# EAGLE board Memory V1.0 (EAGLE 9.6.2)
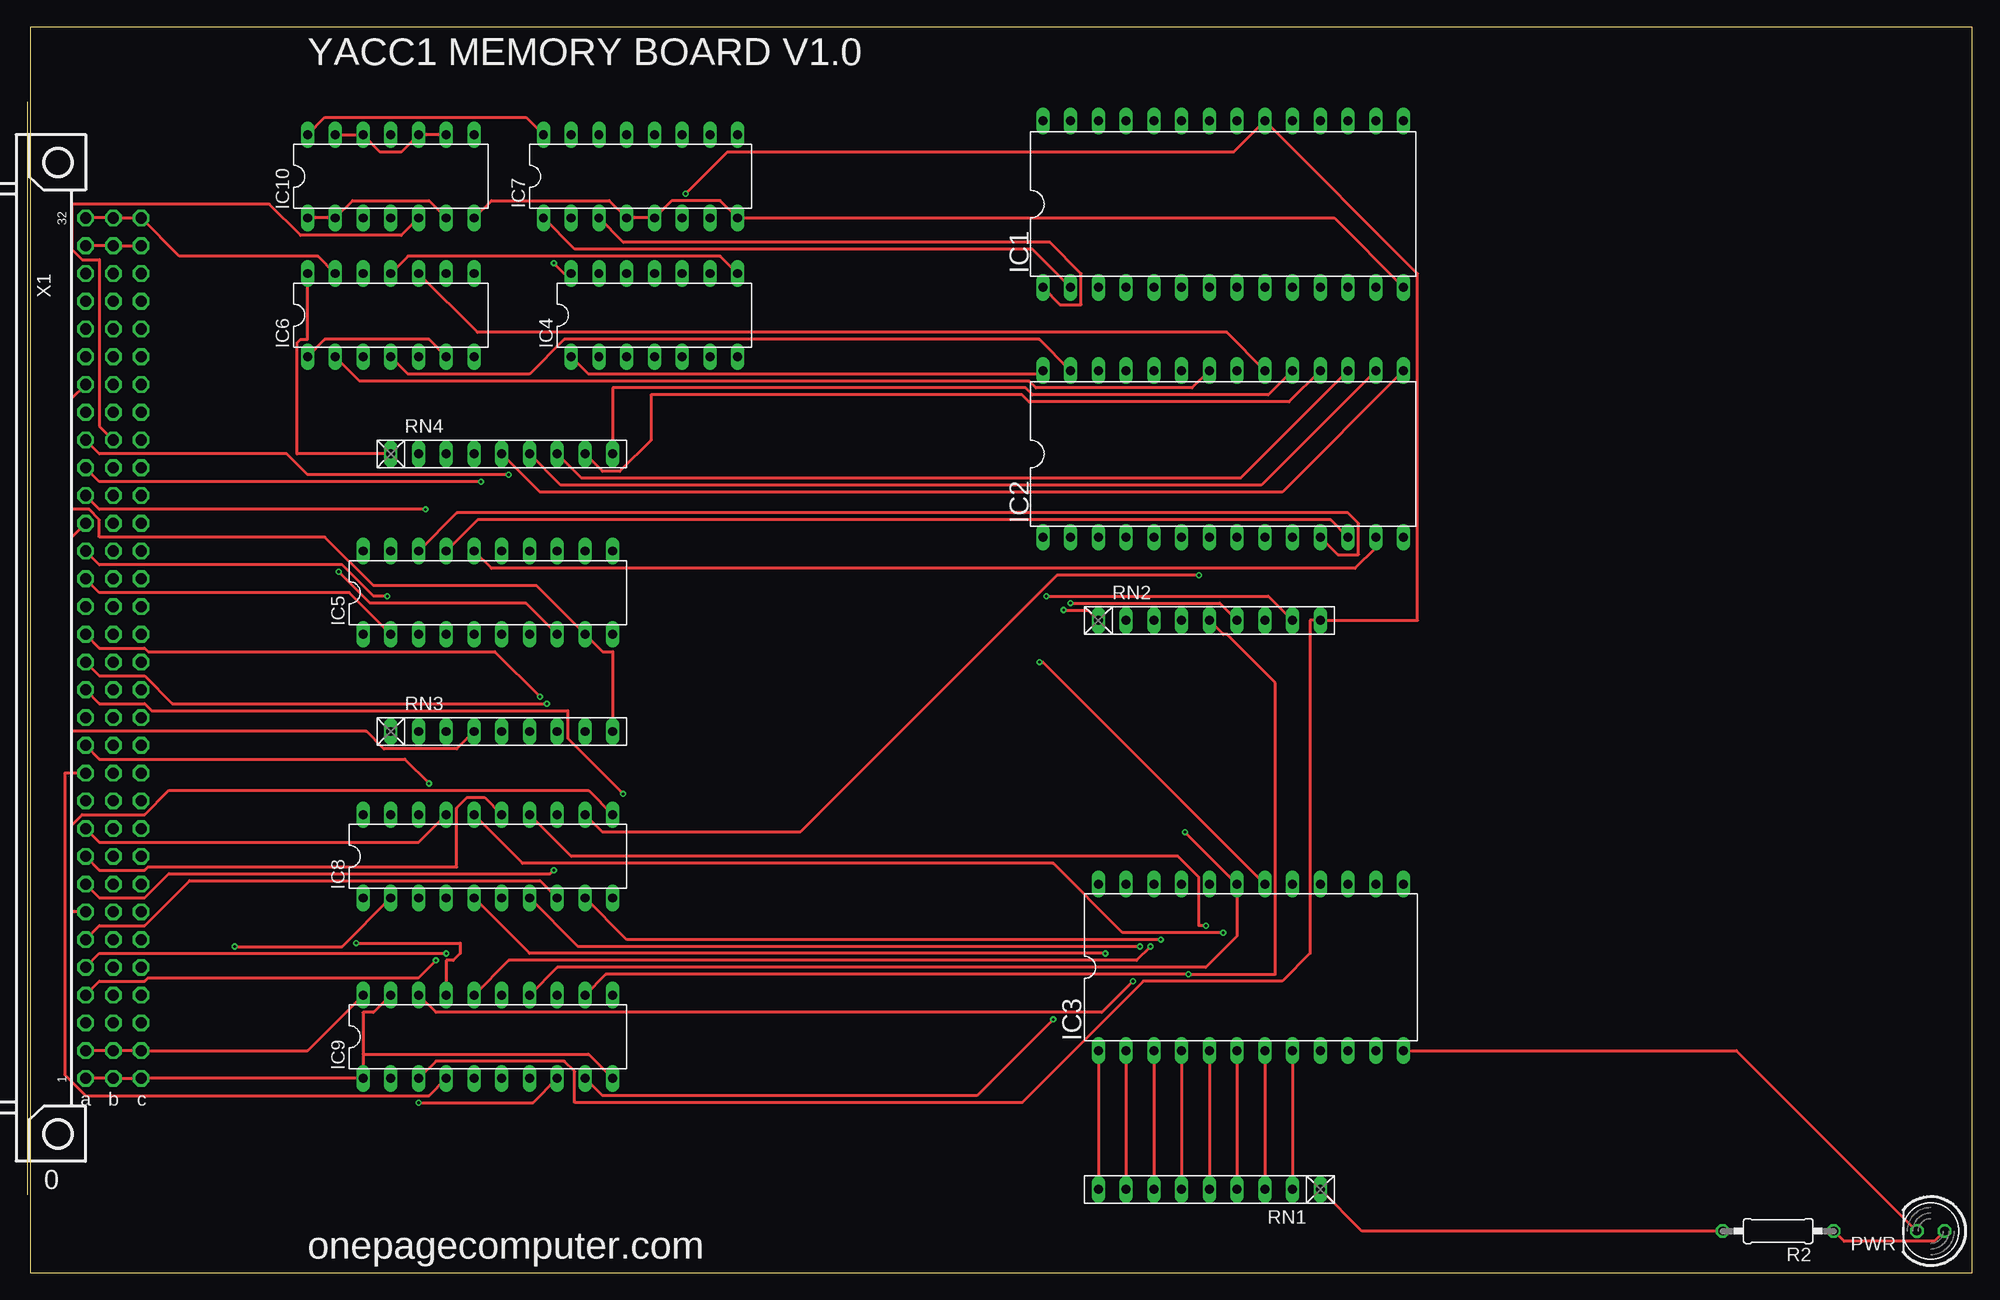
[diagram p0: board, top side]
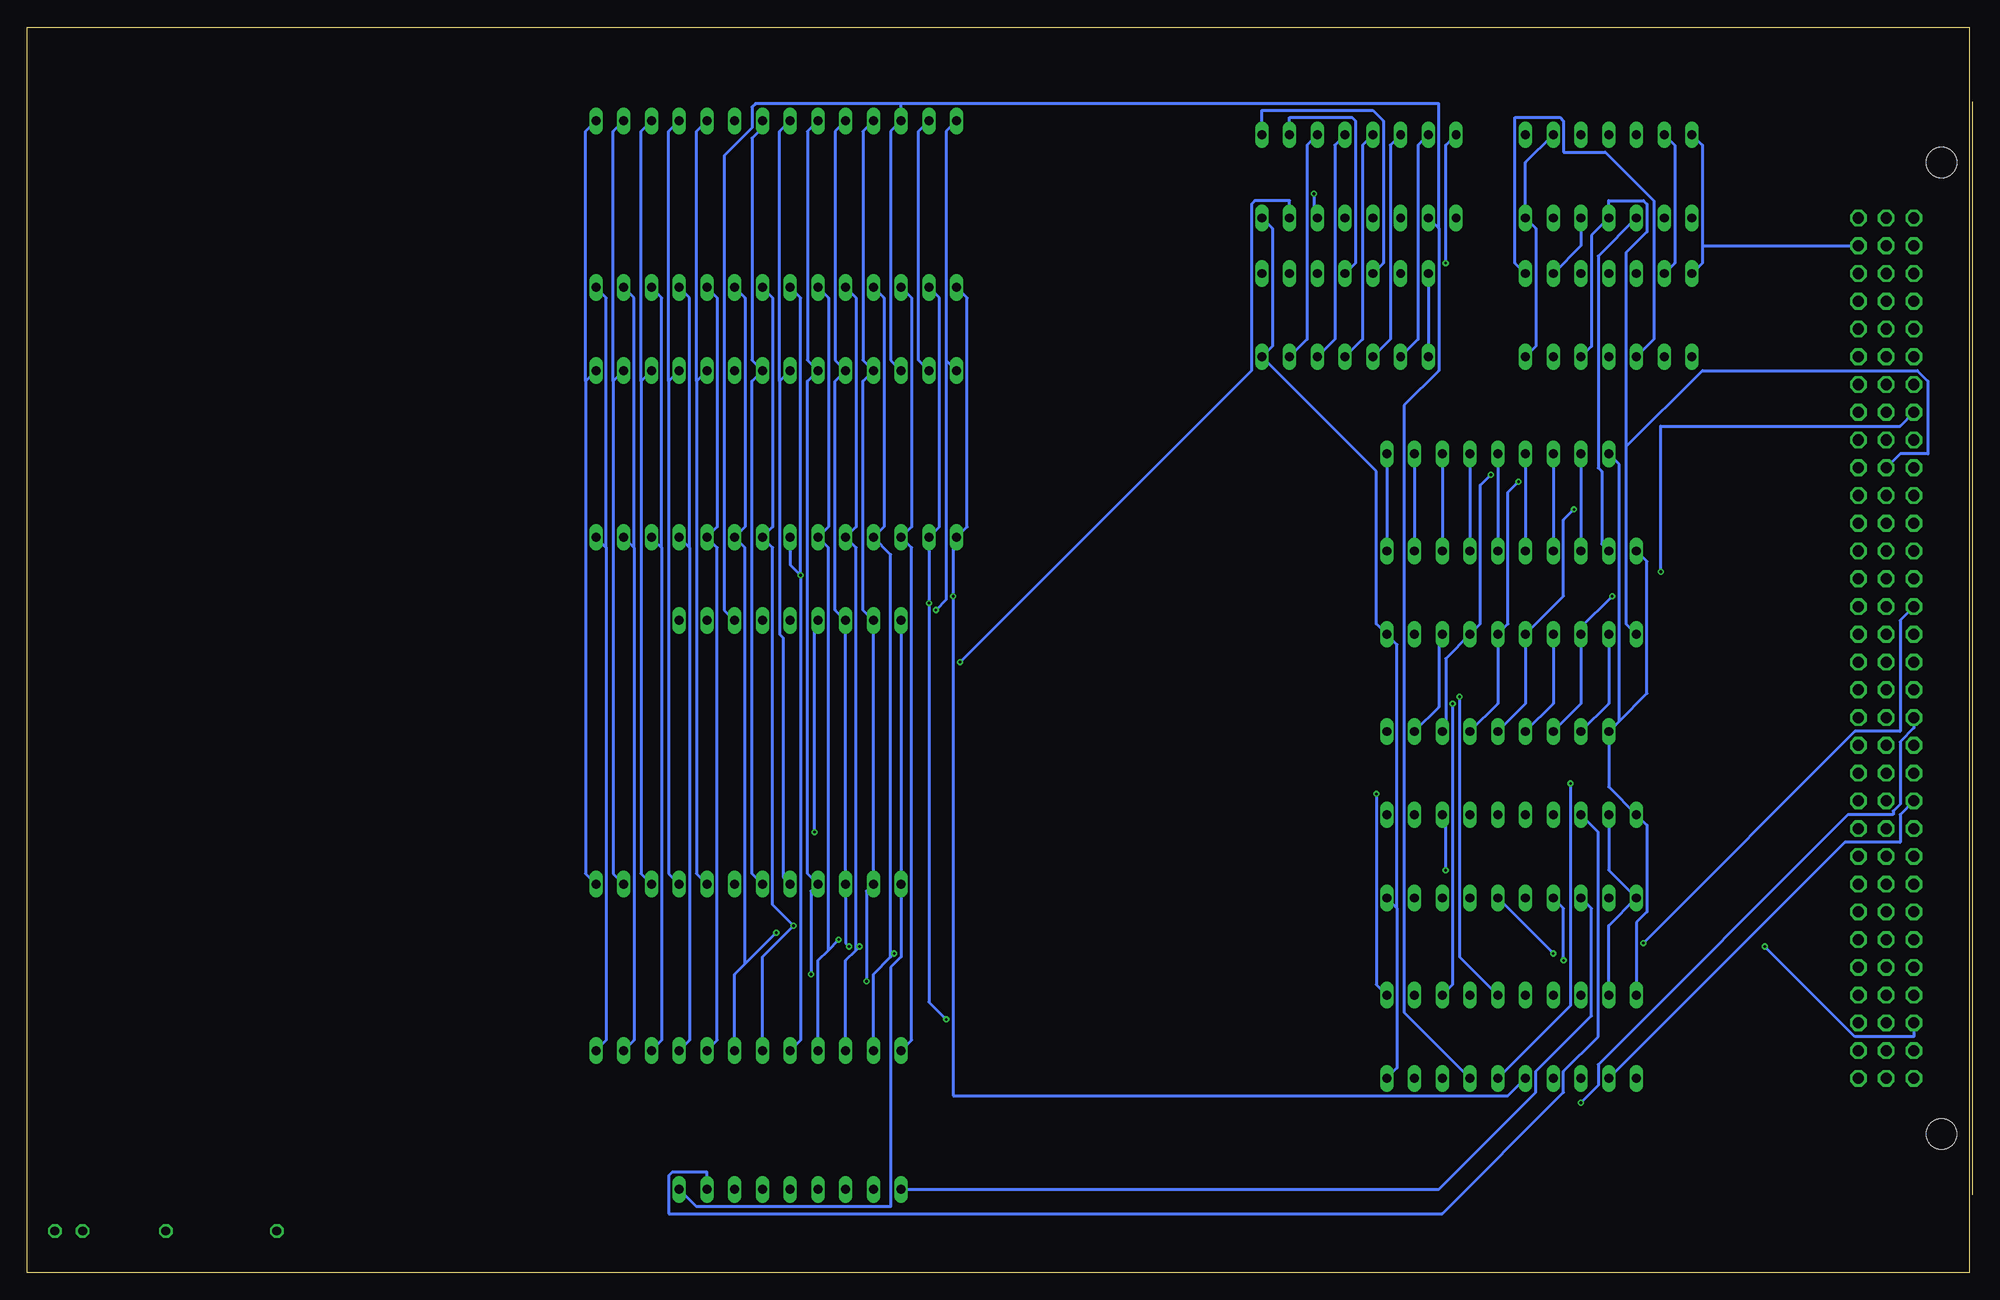
[diagram p1: board, bottom side, seen from below]

Size 177.78 x 113.97 mm. Coordinates in mm from the lower left corner, seen from the top.
Outline: 0,0 177.78,0 177.78,113.97 0,113.97 0,0
Copper layers (1*16): Top 0.035559375mm / dielectric 1.6mm / Bottom 0.035559375mm
Design rules "oshpark-2layer-auto-routing": minimum track width 10mil, minimum drill 10mil, track to track 10mil, track to pad 8mil, pad to pad 8mil, via to via 8mil, smd to smd 6mil, copper to edge 15mil, drill to drill 6mil, minimum pad ring 6mil, minimum via ring 6mil, stop-mask expansion 2.5mil, vias tented up to drill 0mil, thermal gap 10mil
Net classes: 1 GND: width 1 mm; 2 5V: width 1 mm

## Footprints (pad centres in the part's own frame; a part is rotated, then mirrored left to right if it is on the bottom)
DIL28-6 = drill 0.813 long: 1 -16.51,-7.62; 2 -13.97,-7.62; 3 -11.43,-7.62; 4 -8.89,-7.62; 5 -6.35,-7.62; 6 -3.81,-7.62; 7 -1.27,-7.62; 8 1.27,-7.62; 9 3.81,-7.62; 10 6.35,-7.62; 11 8.89,-7.62; 12 11.43,-7.62; 13 13.97,-7.62; 14 16.51,-7.62; 15 16.51,7.62; 16 13.97,7.62; 17 11.43,7.62; 18 8.89,7.62; 19 6.35,7.62; 20 3.81,7.62; 21 1.27,7.62; 22 -1.27,7.62; 23 -3.81,7.62; 24 -6.35,7.62; 25 -8.89,7.62; 26 -11.43,7.62; 27 -13.97,7.62; 28 -16.51,7.62
DIL24 = drill 0.813 long: 1 -13.97,-7.62; 2 -11.43,-7.62; 3 -8.89,-7.62; 4 -6.35,-7.62; 5 -3.81,-7.62; 6 -1.27,-7.62; 7 1.27,-7.62; 8 3.81,-7.62; 9 6.35,-7.62; 10 8.89,-7.62; 11 11.43,-7.62; 12 13.97,-7.62; 13 13.97,7.62; 14 11.43,7.62; 15 8.89,7.62; 16 6.35,7.62; 17 3.81,7.62; 18 1.27,7.62; 19 -1.27,7.62; 20 -3.81,7.62; 21 -6.35,7.62; 22 -8.89,7.62; 23 -11.43,7.62; 24 -13.97,7.62
DIL14 = drill 0.813 long: 1 -7.62,-3.81; 2 -5.08,-3.81; 3 -2.54,-3.81; 4 0,-3.81; 5 2.54,-3.81; 6 5.08,-3.81; 7 7.62,-3.81; 8 7.62,3.81; 9 5.08,3.81; 10 2.54,3.81; 11 0,3.81; 12 -2.54,3.81; 13 -5.08,3.81; 14 -7.62,3.81
DIL20 = drill 0.813 long: 1 -11.43,-3.81; 2 -8.89,-3.81; 3 -6.35,-3.81; 4 -3.81,-3.81; 5 -1.27,-3.81; 6 1.27,-3.81; 7 3.81,-3.81; 8 6.35,-3.81; 9 8.89,-3.81; 10 11.43,-3.81; 11 11.43,3.81; 12 8.89,3.81; 13 6.35,3.81; 14 3.81,3.81; 15 1.27,3.81; 16 -1.27,3.81; 17 -3.81,3.81; 18 -6.35,3.81; 19 -8.89,3.81; 20 -11.43,3.81
DIL16 = drill 0.813 long: 1 -8.89,-3.81; 2 -6.35,-3.81; 3 -3.81,-3.81; 4 -1.27,-3.81; 5 1.27,-3.81; 6 3.81,-3.81; 7 6.35,-3.81; 8 8.89,-3.81; 9 8.89,3.81; 10 6.35,3.81; 11 3.81,3.81; 12 1.27,3.81; 13 -1.27,3.81; 14 -3.81,3.81; 15 -6.35,3.81; 16 -8.89,3.81
LED5MM = drill 0.813 octagon: A -1.27,0; K 1.27,0
0207/10 = drill 0.813 octagon: 1 -5.08,0; 2 5.08,0
RN-9 = drill 0.813 long: 1 -10.16,0; 2 -7.62,0; 3 -5.08,0; 4 -2.54,0; 5 0,0; 6 2.54,0; 7 5.08,0; 8 7.62,0; 9 10.16,0
FABC96R = drill 1.016 octagon: A1 -2.54,39.37; A2 -2.54,36.83; A3 -2.54,34.29; A4 -2.54,31.75; A5 -2.54,29.21; A6 -2.54,26.67; A7 -2.54,24.13; A8 -2.54,21.59; A9 -2.54,19.05; A10 -2.54,16.51; A11 -2.54,13.97; A12 -2.54,11.43; A13 -2.54,8.89; A14 -2.54,6.35; A15 -2.54,3.81; A16 -2.54,1.27; A17 -2.54,-1.27; A18 -2.54,-3.81; A19 -2.54,-6.35; A20 -2.54,-8.89; A21 -2.54,-11.43; A22 -2.54,-13.97; A23 -2.54,-16.51; A24 -2.54,-19.05; A25 -2.54,-21.59; A26 -2.54,-24.13; A27 -2.54,-26.67; A28 -2.54,-29.21; A29 -2.54,-31.75; A30 -2.54,-34.29; A31 -2.54,-36.83; A32 -2.54,-39.37; B1 -5.08,39.37; B2 -5.08,36.83; B3 -5.08,34.29; B4 -5.08,31.75; B5 -5.08,29.21; B6 -5.08,26.67; B7 -5.08,24.13; B8 -5.08,21.59; B9 -5.08,19.05; B10 -5.08,16.51; B11 -5.08,13.97; B12 -5.08,11.43; B13 -5.08,8.89; B14 -5.08,6.35; B15 -5.08,3.81; B16 -5.08,1.27; B17 -5.08,-1.27; B18 -5.08,-3.81; B19 -5.08,-6.35; B20 -5.08,-8.89; B21 -5.08,-11.43; B22 -5.08,-13.97; B23 -5.08,-16.51; B24 -5.08,-19.05; B25 -5.08,-21.59; B26 -5.08,-24.13; B27 -5.08,-26.67; B28 -5.08,-29.21; B29 -5.08,-31.75; B30 -5.08,-34.29; B31 -5.08,-36.83; B32 -5.08,-39.37; C1 -7.62,39.37; C2 -7.62,36.83; C3 -7.62,34.29; C4 -7.62,31.75; C5 -7.62,29.21; C6 -7.62,26.67; C7 -7.62,24.13; C8 -7.62,21.59; C9 -7.62,19.05; C10 -7.62,16.51; C11 -7.62,13.97; C12 -7.62,11.43; C13 -7.62,8.89; C14 -7.62,6.35; C15 -7.62,3.81; C16 -7.62,1.27; C17 -7.62,-1.27; C18 -7.62,-3.81; C19 -7.62,-6.35; C20 -7.62,-8.89; C21 -7.62,-11.43; C22 -7.62,-13.97; C23 -7.62,-16.51; C24 -7.62,-19.05; C25 -7.62,-21.59; C26 -7.62,-24.13; C27 -7.62,-26.67; C28 -7.62,-29.21; C29 -7.62,-31.75; C30 -7.62,-34.29; C31 -7.62,-36.83; C32 -7.62,-39.37 | hole 2.794: 0,-44.456; 0,44.456

## Placement (x,y rotation side)
IC1  [DIL28-6]  109.22,97.79 0 top
IC2  [DIL28-6]  109.22,74.93 0 top
IC3  [DIL24]  111.76,27.94 0 top
IC4  74ALS30N  [DIL14]  57.15,87.63 0 top
IC5  74LS245N  [DIL20]  41.91,62.23 0 top
IC6  74LS04N  [DIL14]  33.02,87.63 0 top
IC7  74LS138N  [DIL16]  55.88,100.33 0 top
IC8  74LS244N  [DIL20]  41.91,38.1 0 top
IC9  74LS244N  [DIL20]  41.91,21.59 0 top
IC10  74ALS00N  [DIL14]  33.02,100.33 0 top
PWR  [LED5MM]  173.99,3.81 180 top
R2  330  [0207/10]  160.02,3.81 180 top
RN1  [RN-9]  107.95,7.62 180 top
RN2  [RN-9]  107.95,59.69 0 top
RN3  [RN-9]  43.18,49.53 0 top
RN4  [RN-9]  43.18,74.93 0 top
X1  FABC96R  [FABC96R]  2.54,57.15 180 top

## Library data of the parts
IC1 IC2 = memory-hitachi; OC_FARNELL: unknown; OC_NEWARK: unknown
IC3 = memory
IC4 IC6-IC10 = 74xx-us
IC5 = adafruit
PWR = led
R2 = eagle-ltspice; SPICEMODEL: NONE; SPICEPREFIX: R
RN1-RN4 = resistor-net; OC_FARNELL: unknown; OC_NEWARK: unknown
X1 = con-vg

## Nets
-AC-LD: X1.C22
-AC-LD-INV: X1.C20
-AC-RD: X1.C21
-ADDR-REG-LD0: X1.C4
-ADDR-REG-LD1: X1.C6
-ADDR-REG-RD0: X1.C3
-ADDR-REG-RD1: X1.C5
-ALU-FUNC: X1.C15
-BUS-EN: X1.C28
-HI-RAM: IC2.20 IC6.10
-HL-SWAP: X1.C25
-IN: X1.C26
-INT: X1.C13
-INTA: X1.C14
-IO-ADDR-LD: X1.C11
-IO-RD: X1.B25
-IO-WR: X1.B26
-MEM-RD: IC5.1 IC6.5 IC10.4 X1.B23
-MEM-WR: IC6.9 IC10.5 X1.B24
-OUT: X1.C27
-REG-DN: X1.B21
-REG-FUNC-LD: X1.B8
-REG-FUNC-RD: X1.B7
-REG-LD-HI: X1.B20
-REG-LD-LO: X1.B18
-REG-RD-HI: X1.B19
-REG-RD-LO: X1.B17
-REG-UP: X1.B22
-RESET: X1.C30
-ROM: IC3.18 IC7.7
-RUN: X1.C29
-SR-LD: X1.C23
-TMP-REG-LD0: X1.B28
-TMP-REG-LD1: X1.B30
-TMP-REG-RD0: X1.B27
-TMP-REG-RD1: X1.B29
ADDR0: IC8.2 X1.A3
ADDR1: IC8.4 X1.A4
ADDR2: IC8.6 X1.A5
ADDR3: IC8.8 X1.A6
ADDR4: IC8.11 X1.A7
ADDR5: IC8.13 X1.A8
ADDR6: IC8.15 X1.A9
ADDR7: IC8.17 X1.A10
ADDR8: IC9.2 X1.A11
ADDR9: IC9.4 X1.A12
ADDR10: IC9.6 X1.A13
ADDR11: IC9.8 X1.A14
ADDR12: IC9.11 X1.A15
ADDR13: IC9.13 X1.A16
ADDR14: IC9.15 X1.A17
ADDR15: IC9.17 X1.A18
ALU0: X1.C16
ALU1: X1.C17
ALU2: X1.C18
ALU3: X1.C19
BADDR0: IC1.10 IC2.10 IC3.8 IC8.18 RN1.2
BADDR1: IC1.9 IC2.9 IC3.7 IC8.16 RN1.3
BADDR2: IC1.8 IC2.8 IC3.6 IC8.14 RN1.4
BADDR3: IC1.7 IC2.7 IC3.5 IC8.12 RN1.5
BADDR4: IC1.6 IC2.6 IC3.4 IC8.9 RN1.6
BADDR5: IC1.5 IC2.5 IC3.3 IC8.7 RN1.7
BADDR6: IC1.4 IC2.4 IC3.2 IC8.5 RN1.8
BADDR7: IC1.3 IC2.3 IC3.1 IC8.3 RN1.9
BADDR8: IC1.25 IC2.25 IC3.23 IC9.18 RN2.2
BADDR9: IC1.24 IC2.24 IC3.22 IC9.16 RN2.3
BADDR10: IC1.21 IC2.21 IC3.19 IC9.14 RN2.4
BADDR11: IC1.23 IC2.23 IC3.21 IC9.12 RN2.5
BADDR12: IC1.2 IC2.2 IC7.1 IC9.9 RN2.6
BADDR13: IC1.26 IC2.26 IC7.2 IC9.7 RN2.7
BADDR14: IC1.1 IC2.1 IC7.3 IC9.5 RN2.8
BADDR15: IC1.20 IC7.6 IC9.3 RN2.9
BDATA0: IC1.11 IC2.11 IC3.9 IC5.18 RN4.2
BDATA1: IC1.12 IC2.12 IC3.10 IC5.17 RN4.3
BDATA2: IC1.13 IC2.13 IC3.11 IC5.16 RN4.4
BDATA3: IC1.15 IC2.15 IC3.13 IC5.15 RN4.5
BDATA4: IC1.16 IC2.16 IC3.14 IC5.14 RN4.6
BDATA5: IC1.17 IC2.17 IC3.15 IC5.13 RN4.7
BDATA6: IC1.18 IC2.18 IC3.16 IC5.12 RN4.8
BDATA7: IC1.19 IC2.19 IC3.17 IC5.11 RN4.9
BR-COND: X1.C24
DATA0: IC5.2 RN3.2 X1.A19
DATA1: IC5.3 RN3.3 X1.A20
DATA2: IC5.4 RN3.4 X1.A21
DATA3: IC5.5 RN3.5 X1.A22
DATA4: IC5.6 RN3.6 X1.A23
DATA5: IC5.7 RN3.7 X1.A24
DATA6: IC5.8 RN3.8 X1.A25
DATA7: IC5.9 RN3.9 X1.A26
DATA8: X1.A27
DATA9: X1.A28
DATA10: X1.A29
DATA11: X1.A30
DATA12: X1.B3
DATA13: X1.B4
DATA14: X1.B5
DATA15: X1.B6
GND: IC1.14 IC2.14 IC3.12 IC4.7 IC5.10 IC6.7 IC6.13 IC7.4 IC7.5 IC7.8 IC8.1 IC8.10 IC8.19 IC9.1 IC9.10 IC9.19 IC10.7 IC10.9 IC10.10 IC10.12 IC10.13 PWR.K X1.A1 X1.A32 X1.B1 X1.B32 X1.C1 X1.C32
IO-ADDR0: X1.C7
IO-ADDR1: X1.C8
IO-ADDR2: X1.C9
IO-ADDR3: X1.C10
MEM-RD: IC6.1 IC6.6
N$1: IC4.12 IC7.9
N$2: IC6.3 IC6.8
N$3: IC1.22 IC2.22 IC3.20 IC6.2
N$4: IC1.27 IC2.27 IC6.4
N$5: IC4.11 IC7.10
N$6: IC4.6 IC7.11
N$7: IC4.5 IC7.12
N$8: IC4.4 IC7.13
N$9: IC4.3 IC7.14
N$10: IC4.2 IC7.15
N$11: PWR.A R2.1
N$12: IC10.1 IC10.2 IC10.6
N$13: IC5.19 IC10.3
N$14: IC4.8 IC6.11
REG-LD-ID0: X1.B13
REG-LD-ID1: X1.B14
REG-LD-ID2: X1.B15
REG-LD-ID3: X1.B16
REG-RD-ID0: X1.B9
REG-RD-ID1: X1.B10
REG-RD-ID2: X1.B11
REG-RD-ID3: X1.B12
UNUSED0: X1.C12
VCC: IC1.28 IC2.28 IC3.24 IC4.1 IC4.14 IC5.20 IC6.14 IC7.16 IC8.20 IC9.20 IC10.14 R2.2 RN1.1 RN2.1 RN3.1 RN4.1 X1.A2 X1.A31 X1.B2 X1.B31 X1.C2 X1.C31

## Tracks (layer width: path | path; a pad name or v marks a point on that pad's centre or on a via)
-HI-RAM
  Top 0.254: IC6.10 40.96,86.04 109.54,86.04 IC2.20
-MEM-RD
  Bottom 0.254: IC5.1 31.43,59.37 31.43,75.56 | 31.43,75.56 31.43,93.34 29.53,95.25 29.53,97.79 29.84,98.11 33.02,98.11 IC10.4 34.61,94.93 34.61,84.77 IC6.5 | X1.B23 6.35,74.93 3.81,74.93 3.81,81.6 4.76,82.55 24.45,82.55 31.43,75.56
-MEM-WR
  Top 0.254: X1.B24 6.35,77.47 6.35,92.71 4.76,92.71 3.81,93.66 3.81,97.79 21.91,97.79 24.77,94.93 33.97,94.93 IC10.5
  Bottom 0.254: IC6.9 35.56,93.98 IC10.5
-ROM  (via drill 0.25)
  Top 0.254: IC3.18 92.71,55.88 v92.39,55.88
  Bottom 0.254: v92.39,55.88 65.72,82.55 65.72,97.79 65.41,98.11 62.23,98.11 IC7.7
ADDR0  (via drill 0.25)
  Top 0.254: IC8.2 28.57,29.84 v18.73,29.84
  Bottom 0.254: v18.73,29.84 10.48,21.59 5.08,21.59 X1.A3
ADDR1  (via drill 0.25)
  Top 0.254: v37.15,28.57 35.56,26.99 10.79,26.99 10.48,26.67 6.35,26.67 X1.A4
  Bottom 0.254: IC8.4 37.15,33.34 v37.15,28.57
ADDR2  (via drill 0.25)
  Top 0.254: v38.1,29.21 6.35,29.21 X1.A5
  Bottom 0.254: v38.1,29.21 IC8.6
ADDR3
  Top 0.254: IC8.8 46.67,35.88 14.61,35.88 10.48,31.75 6.35,31.75 X1.A6
ADDR4
  Top 0.254: IC8.11 51.12,44.13 12.7,44.13 10.48,41.91 4.76,41.91 3.81,40.96 3.81,33.02 X1.A7
ADDR5  (via drill 0.25)
  Top 0.254: v47.94,36.83 47.62,36.51 12.7,36.51 10.48,34.29 6.35,34.29 X1.A8
  Bottom 0.254: IC8.13 47.94,41.59 v47.94,36.83
ADDR6
  Top 0.254: IC8.15 41.59,43.5 40.01,43.5 39.05,42.55 39.05,37.15 10.79,37.15 10.48,36.83 6.35,36.83 X1.A9
ADDR7
  Top 0.254: IC8.17 35.56,39.37 6.35,39.37 X1.A10
ADDR8
  Bottom 0.254: IC9.2 11.43,39.37 6.35,39.37 6.35,41.91 X1.A11
ADDR9
  Top 0.254: IC9.4 36.51,16.19 5.08,16.19 3.17,18.1 3.17,45.72 X1.A12
ADDR10  (via drill 0.25)
  Top 0.254: v36.51,44.77 34.29,46.99 6.35,46.99 X1.A13
  Bottom 0.254: IC9.6 36.51,24.45 v36.51,44.77
ADDR11  (via drill 0.25)
  Top 0.254: IC9.8 46.04,15.56 v35.56,15.56
  Bottom 0.254: v35.56,15.56 33.97,17.14 33.97,19.05 11.11,41.91 6.99,41.91 6.99,42.23 6.35,42.86 6.35,48.58 5.08,49.85 X1.A14
ADDR12  (via drill 0.25)
  Top 0.254: v54.29,43.81 49.21,48.9 49.21,51.44 11.11,51.44 10.48,52.07 6.35,52.07 X1.A15
  Bottom 0.254: IC9.11 54.29,26.35 v54.29,43.81
ADDR13  (via drill 0.25)
  Top 0.254: v47.31,52.07 13.02,52.07 10.48,54.61 6.35,54.61 X1.A16
  Bottom 0.254: IC9.13 47.31,26.35 v47.31,52.07
ADDR14  (via drill 0.25)
  Top 0.254: v46.67,52.7 42.55,56.83 10.79,56.83 10.48,57.15 6.35,57.15 X1.A17
  Bottom 0.254: IC9.15 46.67,28.89 v46.67,52.7
ADDR15  (via drill 0.25)
  Top 0.254: IC9.17 38.1,28.57 38.73,28.57 39.37,29.21 39.37,30.16 v29.84,30.16
  Bottom 0.254: v29.84,30.16 10.48,49.53 6.35,49.53 6.35,59.69 X1.A18
BADDR0
  Top 0.254: IC3.8 RN1.2
  Bottom 0.254: IC1.10 114.62,89.22 114.62,68.26 IC2.10 114.62,66.36 114.62,21.27 IC3.8 | IC8.18 33.97,40.32 33.97,21.59 37.15,18.41 37.15,16.51 48.26,5.4 119.06,5.4 119.06,8.89 118.75,9.21 115.57,9.21 RN1.2
BADDR1  (via drill 0.25)
  Top 0.254: IC3.7 RN1.3 | IC8.16 45.09,37.47 93.66,37.47 100.01,31.11 v109.22,31.11
  Bottom 0.254: IC1.9 112.08,89.22 112.08,68.26 IC2.9 112.08,66.36 112.08,28.26 | 112.08,28.26 113.03,27.3 IC3.7 | 112.08,28.26 v109.22,31.11
BADDR2  (via drill 0.25)
  Top 0.254: IC8.14 49.53,38.1 105.09,38.1 107,36.2 107,31.75 v107.63,31.75 | IC3.6 RN1.4
  Bottom 0.254: IC1.8 109.54,89.22 109.54,68.26 IC2.8 109.54,66.36 109.54,33.66 v107.63,31.75 110.49,28.89 IC3.6
BADDR3  (via drill 0.25)
  Top 0.254: IC3.5 RN1.5 | IC8.12 52.39,40.32 70.48,40.32 93.98,63.82 v107,63.82
  Bottom 0.254: v107,63.82 107.95,64.77 IC2.7 | IC1.7 107,89.22 v107,63.82 | IC3.5 107,21.27 v107,63.82
BADDR4  (via drill 0.25)
  Top 0.254: IC3.4 RN1.6 | IC8.9 54.61,30.48 v103.5,30.48
  Bottom 0.254: IC1.6 104.46,89.22 104.46,68.26 IC2.6 104.46,66.36 104.46,29.53 | 104.46,29.53 105.41,28.57 IC3.4 | 104.46,29.53 v103.5,30.48
BADDR5  (via drill 0.25)
  Top 0.254: IC3.3 RN1.7 | IC8.7 50.16,29.84 v101.6,29.84
  Bottom 0.254: IC1.5 101.92,89.22 101.92,68.26 IC2.5 101.92,66.36 101.92,29.53 | 101.92,29.53 102.87,28.57 IC3.3 | 101.92,29.53 v101.6,29.84
BADDR6  (via drill 0.25)
  Top 0.254: IC3.2 RN1.8 | IC8.5 45.72,29.21 v98.42,29.21
  Bottom 0.254: IC1.4 99.38,89.22 99.38,68.26 IC2.4 98.74,65.72 98.74,28.89 | 98.74,28.89 100.33,27.3 IC3.2 | 98.74,28.89 v98.42,29.21
BADDR7
  Top 0.254: IC3.1 RN1.9
  Bottom 0.254: IC1.3 96.84,89.22 96.84,68.26 IC2.3 96.84,66.36 96.84,21.27 IC3.1 | IC8.3 34.61,33.34 34.61,23.5 39.69,18.41 39.69,16.51 48.58,7.62 RN1.9
BADDR8  (via drill 0.25)
  Top 0.254: IC9.18 37.15,23.81 98.11,23.81 v100.97,26.67
  Bottom 0.254: IC1.25 101.28,104.46 101.28,83.5 IC2.25 101.28,81.6 101.28,60.64 RN2.2 IC3.23 100.97,34.92 v100.97,26.67
BADDR9  (via drill 0.25)
  Top 0.254: IC9.16 43.81,28.57 101.28,28.57 v102.55,29.84
  Bottom 0.254: IC1.24 103.82,104.46 103.82,83.5 IC2.24 103.82,81.6 103.82,60.64 RN2.3 IC3.22 102.87,30.16 v102.55,29.84
BADDR10  (via drill 0.25)
  Top 0.254: IC9.14 48.26,27.94 107.63,27.94 110.49,30.8 IC3.19 v105.73,40.32
  Bottom 0.254: IC1.21 110.49,104.78 111.44,103.82 111.44,83.5 IC2.21 111.44,81.6 111.44,36.51 IC3.19 | RN2.4 105.73,59.37 v105.73,40.32
BADDR11  (via drill 0.25)
  Top 0.254: IC9.12 52.7,27.3 v106.05,27.3 113.98,27.3 113.98,53.98 109.54,58.42 109.22,58.42 RN2.5
  Bottom 0.254: IC1.23 106.36,104.46 106.36,83.5 IC2.23 106.36,81.6 106.36,36.51 IC3.21 106.05,34.92 v106.05,27.3
BADDR12  (via drill 0.25)
  Top 0.254: IC9.9 52.39,16.19 86.68,16.19 v93.66,23.18 | RN2.6 108.9,61.28 v95.25,61.28 | IC7.1 49.85,93.66 91.76,93.66 IC1.2
  Bottom 0.254: v93.66,23.18 95.25,24.77 v95.25,61.28 IC2.2 94.3,68.26 94.3,89.22 IC1.2
BADDR13
  Bottom 0.254: IC2.26 98.74,83.5 98.74,104.46 IC1.26 97.79,107 | RN2.7 113.98,60.64 113.98,102.23 111.44,104.78 111.44,106.68 111.12,107 97.79,107 | IC9.7 51.75,23.81 51.75,79.38 48.58,82.55 48.58,95.57 | IC7.2 48.58,95.57 | 97.79,107 48.58,107 48.58,95.57
BADDR14  (via drill 0.25)
  Top 0.254: IC7.3 54.29,94.3 93.34,94.3 96.2,91.44 96.2,88.58 94.3,88.58 IC1.1 | RN2.8 113.35,61.91 v93.03,61.91
  Bottom 0.254: IC9.5 42.23,16.19 93.03,16.19 v93.03,61.91 93.03,66.99 IC2.1 91.76,68.26 91.76,89.22 IC1.1
BADDR15  (via drill 0.25)
  Top 0.254: v60.01,98.74 63.82,102.55 110.17,102.55 IC1.20 127,91.44 127,59.69 RN2.9 117.16,59.69 117.16,29.21 114.62,26.67 101.92,26.67 90.81,15.56 49.85,15.56 49.85,18.41 48.9,19.37 37.15,19.37 IC9.3
  Bottom 0.254: IC7.6 60.01,96.84 v60.01,98.74
BDATA0
  Top 0.254: IC5.18 39.05,69.53 120.65,69.53 121.6,68.58 121.6,65.72 119.7,65.72 IC2.11
  Bottom 0.254: RN4.2 IC5.18 | IC3.9 117.16,21.27 117.16,66.36 | IC2.11 117.16,66.36 | IC1.11 117.16,89.22 117.16,66.36
BDATA1
  Top 0.254: IC5.17 40.96,68.9 119.06,68.9 IC2.12
  Bottom 0.254: RN4.3 IC5.17 | IC3.10 119.7,21.27 119.7,66.36 | IC2.12 119.7,66.36 | IC1.12 119.7,89.22 119.7,66.36
BDATA2
  Top 0.254: IC5.16 42.23,64.45 121.28,64.45 123.19,66.36 IC2.13
  Bottom 0.254: RN4.4 IC5.16 | IC3.11 122.24,21.27 122.24,66.36 | IC2.13 122.24,66.36 | IC1.13 122.24,89.22 122.24,66.36
BDATA3
  Top 0.254: RN4.5 46.67,71.44 114.62,71.44 IC2.15
  Bottom 0.254: RN4.5 IC5.15 | IC3.13 126.68,36.51 126.68,81.6 | IC2.15 126.68,81.6 | IC1.15 126.68,104.46 126.68,81.6
BDATA4
  Top 0.254: RN4.6 48.58,72.07 112.71,72.07 IC2.16
  Bottom 0.254: RN4.6 IC5.14 | IC3.14 124.14,36.51 124.14,81.6 | IC2.16 124.14,81.6 | IC1.16 124.14,104.46 124.14,81.6
BDATA5
  Top 0.254: RN4.7 50.48,72.71 110.81,72.71 IC2.17
  Bottom 0.254: RN4.7 IC5.13 | IC3.15 121.6,36.51 121.6,81.6 | IC2.17 121.6,81.6 | IC1.17 121.6,104.46 121.6,81.6
BDATA6
  Top 0.254: RN4.8 52.39,73.34 53.98,73.34 56.83,76.2 56.83,80.33 90.81,80.33 91.44,79.69 115.25,79.69 IC2.18
  Bottom 0.254: RN4.8 IC5.12 | IC3.16 119.06,36.51 119.06,81.6 | IC2.18 119.06,81.6 | IC1.18 119.06,104.46 119.06,81.6
BDATA7
  Top 0.254: RN4.9 53.34,80.96 91.12,80.96 91.76,80.33 113.35,80.33 IC2.19
  Bottom 0.254: RN4.9 IC5.11 | IC3.17 116.52,36.51 116.52,81.6 | IC2.19 116.52,81.6 | IC1.19 116.52,104.46 116.52,81.6
DATA0
  Top 0.254: X1.A19 6.35,62.23 29.21,62.23 IC5.2
  Bottom 0.254: RN3.2 33.02,52.07 IC5.2
DATA1  (via drill 0.25)
  Top 0.254: X1.A20 6.35,64.77 28.57,64.77 31.43,61.91 v32.7,61.91
  Bottom 0.254: RN3.3 35.56,52.07 IC5.3 35.56,59.05 v32.7,61.91
DATA2
  Top 0.254: X1.A21 3.81,67.31 3.81,49.53 30.8,49.53 32.38,47.94 39.05,47.94 RN3.4
  Bottom 0.254: RN3.4 38.1,52.07 IC5.4
DATA3  (via drill 0.25)
  Top 0.254: X1.A22 6.35,69.85 v36.2,69.85
  Bottom 0.254: RN3.5 40.64,52.07 IC5.5 37.15,61.91 37.15,68.9 v36.2,69.85
DATA4  (via drill 0.25)
  Top 0.254: X1.A23 6.35,72.39 v41.27,72.39
  Bottom 0.254: RN3.6 43.18,52.07 IC5.6 42.23,59.37 42.23,71.44 v41.27,72.39
DATA5  (via drill 0.25)
  Top 0.254: X1.A24 6.35,74.93 23.5,74.93 25.4,73.03 v43.81,73.03
  Bottom 0.254: RN3.7 47.94,49.85 47.94,56.2 IC5.7 44.77,59.37 44.77,72.07 v43.81,73.03
DATA6  (via drill 0.25)
  Top 0.254: v28.26,64.14 31.11,61.28 45.4,61.28 IC5.8
  Bottom 0.254: RN3.8 48.58,51.75 48.58,58.1 IC5.8 | X1.A25 6.35,77.47 28.26,77.47 v28.26,64.14
DATA7
  Top 0.254: RN3.9 53.34,56.83 52.39,56.83 IC5.9 46.35,62.87 31.43,62.87 26.99,67.31 6.35,67.31 6.35,68.9 5.4,69.85 3.81,69.85 3.81,80.01 X1.A26
GND
  Top 0.254: PWR.K 156.21,20.32 IC3.12 | X1.A32 X1.B32 X1.C32 13.65,93.03 26.35,93.03 IC6.13 | IC10.13 IC10.12 32.07,102.55 33.97,102.55 IC10.10 IC10.9 | IC10.7 42.23,98.11 53.02,98.11 IC7.4 IC7.5 58.74,98.11 63.18,98.11 IC7.8 119.38,96.52 IC1.14 | X1.A1 X1.B1 X1.C1 IC9.1 30.48,20 | 30.48,20 30.48,23.81 31.43,23.81 IC9.19 | IC9.10 51.12,20 30.48,20
  Bottom 0.254: IC3.12 124.78,21.27 124.78,66.36 | IC2.14 124.78,66.36 | IC1.14 124.78,89.22 124.78,66.36 | IC6.13 26.99,92.39 26.99,103.19 IC10.13 | IC7.8 63.82,95.57 63.82,84.77 IC4.7 54.29,73.34 54.29,59.37 IC5.10 52.39,57.47 52.39,33.34 | IC6.7 39.69,84.77 39.69,95.57 IC10.7 40.64,101.6 IC10.9 | IC9.10 52.39,18.73 52.39,33.34 | IC8.10 52.39,33.34 | IC8.19 33.02,36.83 IC8.1 33.02,31.75 IC9.19
MEM-RD
  Top 0.254: IC6.1 26.99,85.41 36.51,85.41 IC6.6
N$1
  Bottom 0.254: IC4.12 53.66,92.39 53.66,105.41 54.61,106.36 64.77,106.36 IC7.9
N$2
  Bottom 0.254: IC6.3 28.89,85.41 28.89,98.11 33.34,102.55 37.15,102.55 37.15,105.41 37.47,105.73 41.59,105.73 41.59,92.39 IC6.8
N$3
  Top 0.254: IC6.2 30.16,81.6 91.44,81.6 92.08,80.96 106.36,80.96 IC2.22
  Bottom 0.254: IC3.20 108.58,36.2 108.58,58.1 108.9,58.42 108.9,81.6 | IC2.22 108.9,81.6 | IC1.22 108.9,104.46 108.9,81.6
N$4
  Top 0.254: IC6.4 34.61,82.23 45.72,82.23 48.9,85.41 92.39,85.41 IC2.27
  Bottom 0.254: IC1.27 96.2,104.46 96.2,83.5 IC2.27
N$5
  Bottom 0.254: IC4.11 56.2,92.39 56.2,105.41 56.52,105.73 62.23,105.73 IC7.10
N$6
  Bottom 0.254: IC4.6 60.64,85.41 60.64,103.19 IC7.11
N$7
  Bottom 0.254: IC4.5 58.1,85.41 58.1,103.19 IC7.12
N$8
  Bottom 0.254: IC4.4 55.56,85.41 55.56,103.19 IC7.13
N$9
  Bottom 0.254: IC4.3 53.02,85.41 53.02,103.19 IC7.14
N$10
  Bottom 0.254: IC4.2 50.48,85.41 50.48,103.19 IC7.15
N$11
  Top 0.254: R2.1 166.05,2.86 174.31,2.86 PWR.A
N$12
  Top 0.254: IC10.1 IC10.2 29.53,98.11 36.51,98.11 IC10.6
N$13
  Bottom 0.254: IC5.19 33.66,66.67 33.66,73.34 33.97,73.66 33.97,93.03 IC10.3
N$14
  Top 0.254: IC6.11 34.61,93.03 63.18,93.03 IC4.8
VCC  (via drill 0.25)
  Top 0.254: X1.A31 X1.B31 X1.C31 | IC7.16 45.4,105.73 26.99,105.73 IC10.14 | X1.A2 X1.B2 X1.C2 25.4,20.32 IC9.20 | IC6.14 25.4,85.41 24.77,85.41 24.45,85.09 24.45,74.93 RN4.1 | RN1.1 121.92,3.81 R2.2 | IC4.1 51.12,82.23 92.39,82.23 IC2.28 | RN2.1 96.84,60.64 v94.61,60.64 | v47.94,92.39 48.9,91.44 IC4.14
  Bottom 0.254: IC6.14 24.45,92.39 24.45,93.98 | 24.45,93.98 24.45,103.19 IC10.14 | 24.45,93.98 X1.C31 | IC5.20 29.53,65.09 29.53,53.02 32.07,50.48 | 32.07,50.48 RN3.1 33.02,44.45 IC8.20 29.53,40.96 29.53,33.02 30.48,32.07 IC9.20 | RN4.1 32.07,73.98 32.07,50.48 | RN2.1 IC3.24 97.79,28.89 98.74,27.94 98.74,6.03 116.52,6.03 RN1.1 | IC4.14 IC4.1 | 93.66,83.5 IC2.28 | 93.66,83.5 93.66,104.46 IC1.28 | v94.61,60.64 93.66,61.59 93.66,83.5 | IC7.16 47.94,103.19 v47.94,92.39

## Text on the board
tNames: YACC1 MEMORY BOARD V1.0 | 0 | onepagecomputer.com